# EAGLE board h (EAGLE 4.16)
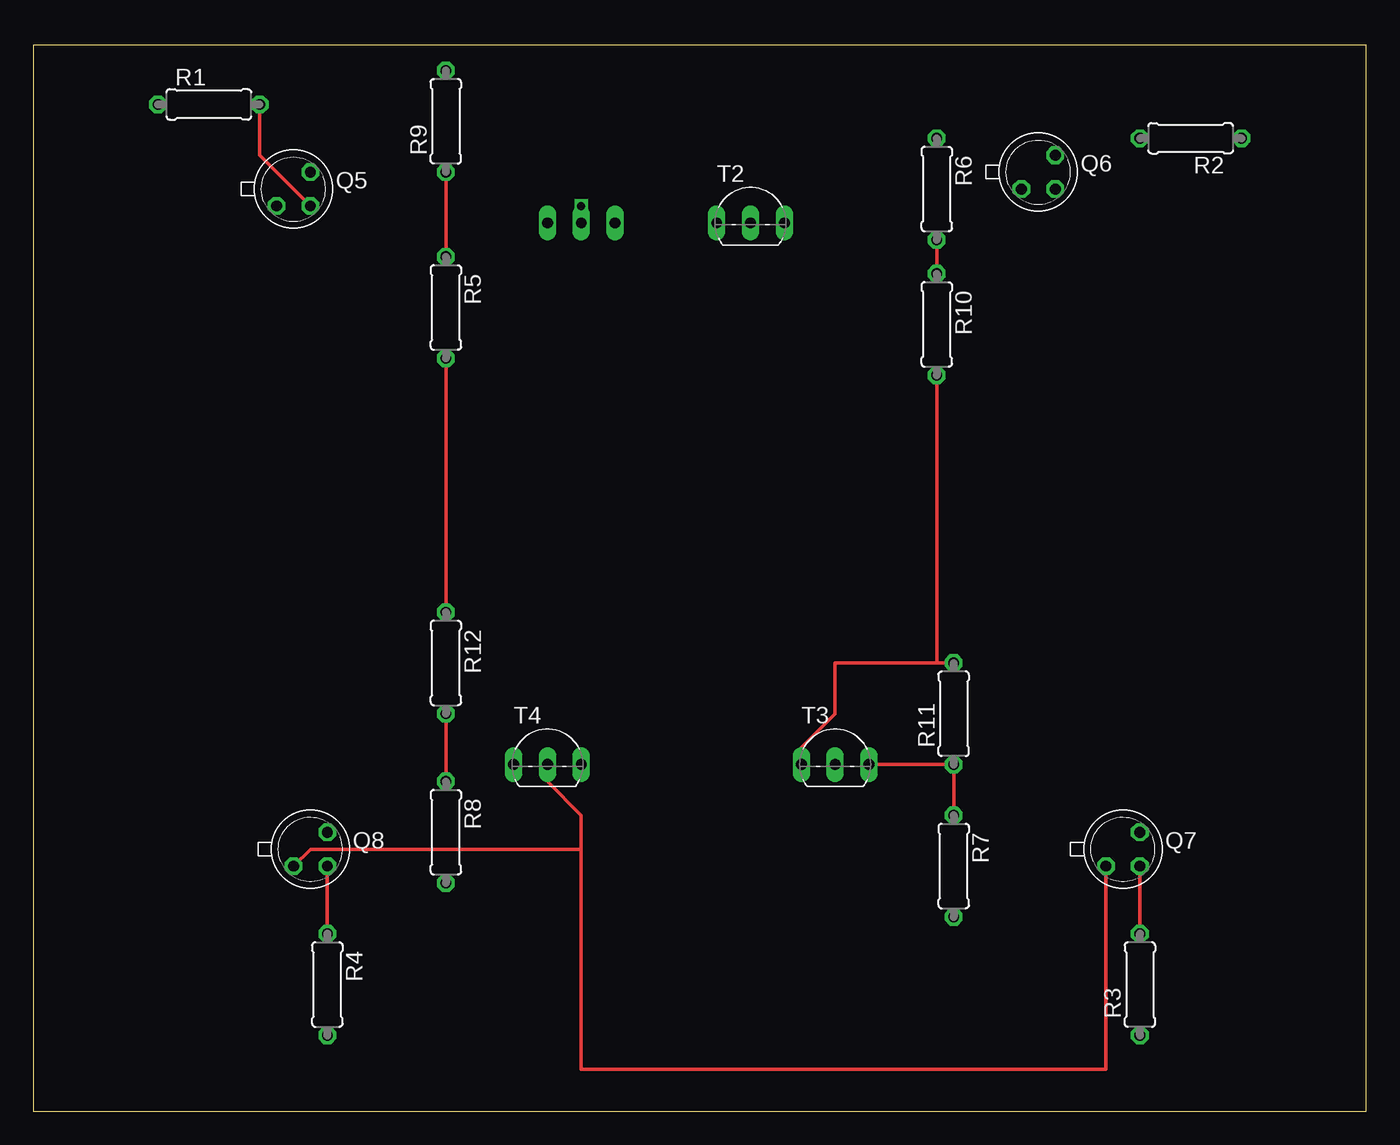
[diagram p0: board, top side]
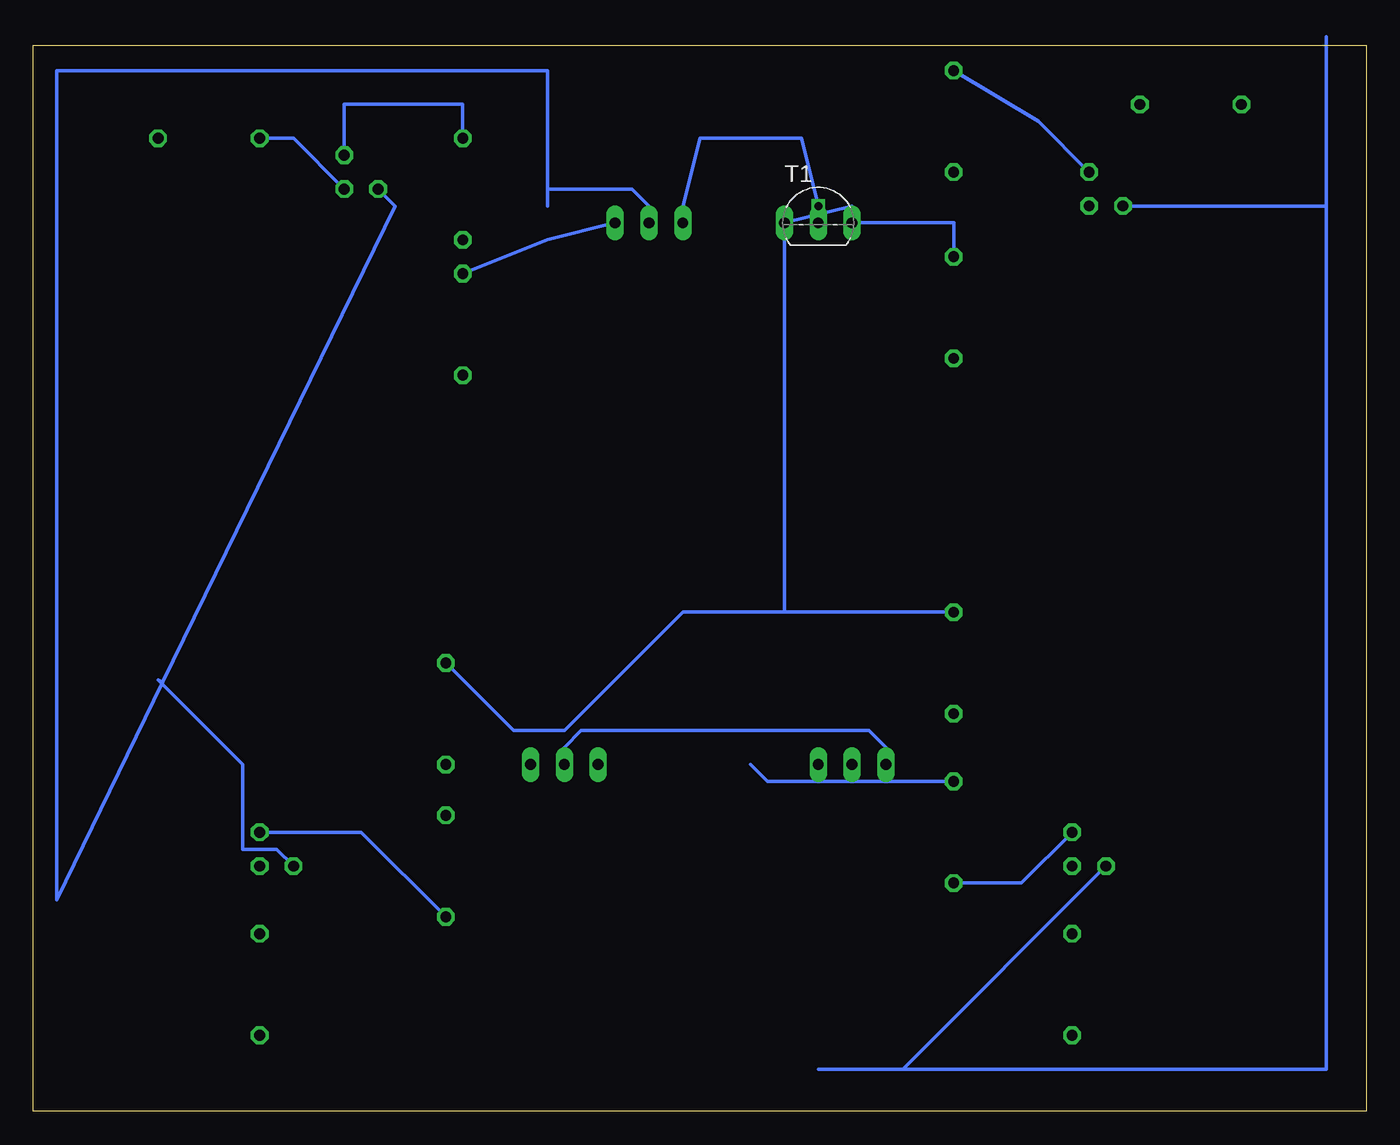
[diagram p1: board, bottom side, seen from below]

Size 100 x 80 mm. Coordinates in mm from the lower left corner, seen from the top.
Outline: 0,0 100,0 100,80 0,80 0,0
Copper layers (1*16): Top 0.035mm / dielectric 1.5mm / Bottom 0.035mm
Design rules "default": minimum track width 10mil, minimum drill 24mil, track to track 8mil, track to pad 8mil, pad to pad 8mil, via to via 8mil, smd to smd 8mil, copper to edge 40mil, drill to drill 8mil, minimum pad ring 10mil, minimum via ring 8mil, stop-mask expansion 4mil, vias tented up to drill 0mil, thermal gap 10mil

## Footprints (pad centres in the part's own frame; a part is rotated, then mirrored left to right if it is on the bottom)
TO18 = drill 0.813 octagon: 1 -1.27,-1.27; 2 1.27,-1.27; 3 1.27,1.27
0207/7 = drill 0.813 octagon: 1 -3.81,0; 2 3.81,0
TO92-BCE = drill 0.813 long: B 2.54,0; C 0,0; E -2.54,0

## Placement (x,y rotation side)
Q5  2N2222  [TO18]  19.52,69.21 0 top
Q6  2N2222  [TO18]  75.4,70.48 0 top
Q7  2N2222  [TO18]  81.75,19.68 0 top
Q8  2N2222  [TO18]  20.79,19.68 0 top
R1  22k  [0207/7]  13.17,75.56 0 top
R2  22k  [0207/7]  86.83,73.02 180 top
R3  22k  [0207/7]  83.02,9.52 90 top
R4  22k  [0207/7]  22.06,9.52 270 top
R5  10k  [0207/7]  30.95,60.32 270 top
R6  100  [0207/7]  67.78,69.21 270 top
R7  100  [0207/7]  69.05,18.41 270 top
R8  100  [0207/7]  30.95,20.95 270 top
R9  100  [0207/7]  30.95,74.29 90 top
R10  10k  [0207/7]  67.78,59.05 270 top
R11  10k  [0207/7]  69.05,29.84 90 top
R12  10k  [0207/7]  30.95,33.65 270 top
T1  [TO92-BCE]  41.11,66.67 0 bottom
T2  [TO92-BCE]  53.81,66.67 0 top
T3  [TO92-BCE]  60.16,26.03 0 top
T4  [TO92-BCE]  38.57,26.03 0 top

## Library data of the parts
Q5-Q8 = transistor-npn
R1-R12 = rcl
T1-T4 = transistor

## Nets
+12V: R5.2 R10.2 R11.2 R12.1 T1.E T3.E
GND: Q5.1 Q6.1 Q7.1 Q8.1 T2.C T4.C
N$1: T3.C T4.E
N$2: T1.C T2.E
N$3: R7.1 R11.1 T3.B
N$4: Q8.2 R4.1
N$5: R6.2 R10.1 T2.B
N$6: R8.1 R12.2 T4.B
N$7: R5.1 R9.1 T1.B
N$8: Q5.2 R1.2
N$9: Q5.3 R9.2
N$10: Q6.3 R6.1
N$11: Q7.3 R7.2
N$12: Q7.2 R3.2
N$13: Q6.2 R2.2
N$14: Q8.3 R8.2

## Tracks (layer width: path | path; a pad name or v marks a point on that pad's centre or on a via)
+12V
  Top 0.254: 67.78,33.65 60.16,33.65 60.16,29.84 57.62,27.3 T3.E | R11.2 67.78,33.65 | 67.78,33.65 R10.2 | 30.95,48.89 R12.1 R5.2
  Bottom 0.254: R12.1 43.65,37.46 | 43.65,37.46 51.27,37.46 60.16,28.57 63.97,28.57 R11.2 | 43.65,37.46 T1.E 38.57,67.94
GND
  Top 0.254: Q7.1 80.48,3.17 41.11,3.17 41.11,19.68 | 41.11,19.68 41.11,22.22 38.57,24.76 T4.C | Q8.1 20.79,19.68 41.11,19.68
  Bottom 0.254: Q6.1 72.86,67.94 90.29,32.21 | 61.43,69.21 61.43,78.1 98.26,78.1 98.26,15.87 90.29,32.21 | 61.43,69.21 61.43,67.94 | 34.76,3.17 Q8.1 | 34.76,3.17 41.11,3.17 | 3.01,67.94 3.01,3.17 34.76,3.17 | 3.01,67.94 3.01,80.64 | 3.01,67.94 Q5.1 | 61.43,69.21 55.08,69.21 53.81,67.94 T2.C | Q7.1 81.75,19.68 84.29,19.68 84.29,26.03 90.64,32.38 90.29,32.21
N$1
  Bottom 0.254: T4.E 36.03,27.3 37.3,28.57 58.89,28.57 60.16,27.3 T3.C
N$2  (via drill 0.6)
  Top 0.254: T1.C v41.11,67.94
  Bottom 0.254: v41.11,67.94 42.38,73.02 50,73.02 51.27,67.94 T2.E
N$3
  Top 0.254: R7.1 R11.1 T3.B
N$4
  Top 0.254: R4.1 Q8.2
N$5
  Top 0.254: R10.1 R6.2
  Bottom 0.254: T2.B 61.43,65.4 R10.1
N$6
  Top 0.254: R8.1 R12.2
  Bottom 0.254: 46.19,26.03 44.92,24.76 41.11,24.76 | R8.1 41.11,24.76 | 41.11,24.76 T4.B
N$7  (via drill 0.6)
  Top 0.254: R5.1 R9.1
  Bottom 0.254: R5.1 30.95,66.67 T1.B
  other vias: 38.57,66.67
N$8
  Top 0.254: Q5.2 16.98,71.75 R1.2
N$9
  Bottom 0.254: Q5.3 24.6,74.29 R9.2
N$10
  Bottom 0.254: R6.1 67.78,75.56 76.67,75.56 Q6.3
N$11
  Bottom 0.254: R7.2 75.4,20.95 Q7.3
N$12
  Top 0.254: R3.2 Q7.2
N$13
  Bottom 0.254: Q6.2 80.48,73.02 R2.2
N$14
  Bottom 0.254: Q8.3 25.87,17.14 R8.2